# Altium PCB STM32F030F4_Mini.PcbDoc
Units mil, origin at the board's own origin, x right, y up, seen from the top; angles counter-clockwise.
Board outline 1250 x 1630 mil, 2 copper layers (Top Layer, Bottom Layer); 24 components, 26 nets, 99 pads, 11 vias.
Unrouted connection lines stored in the file: 13.
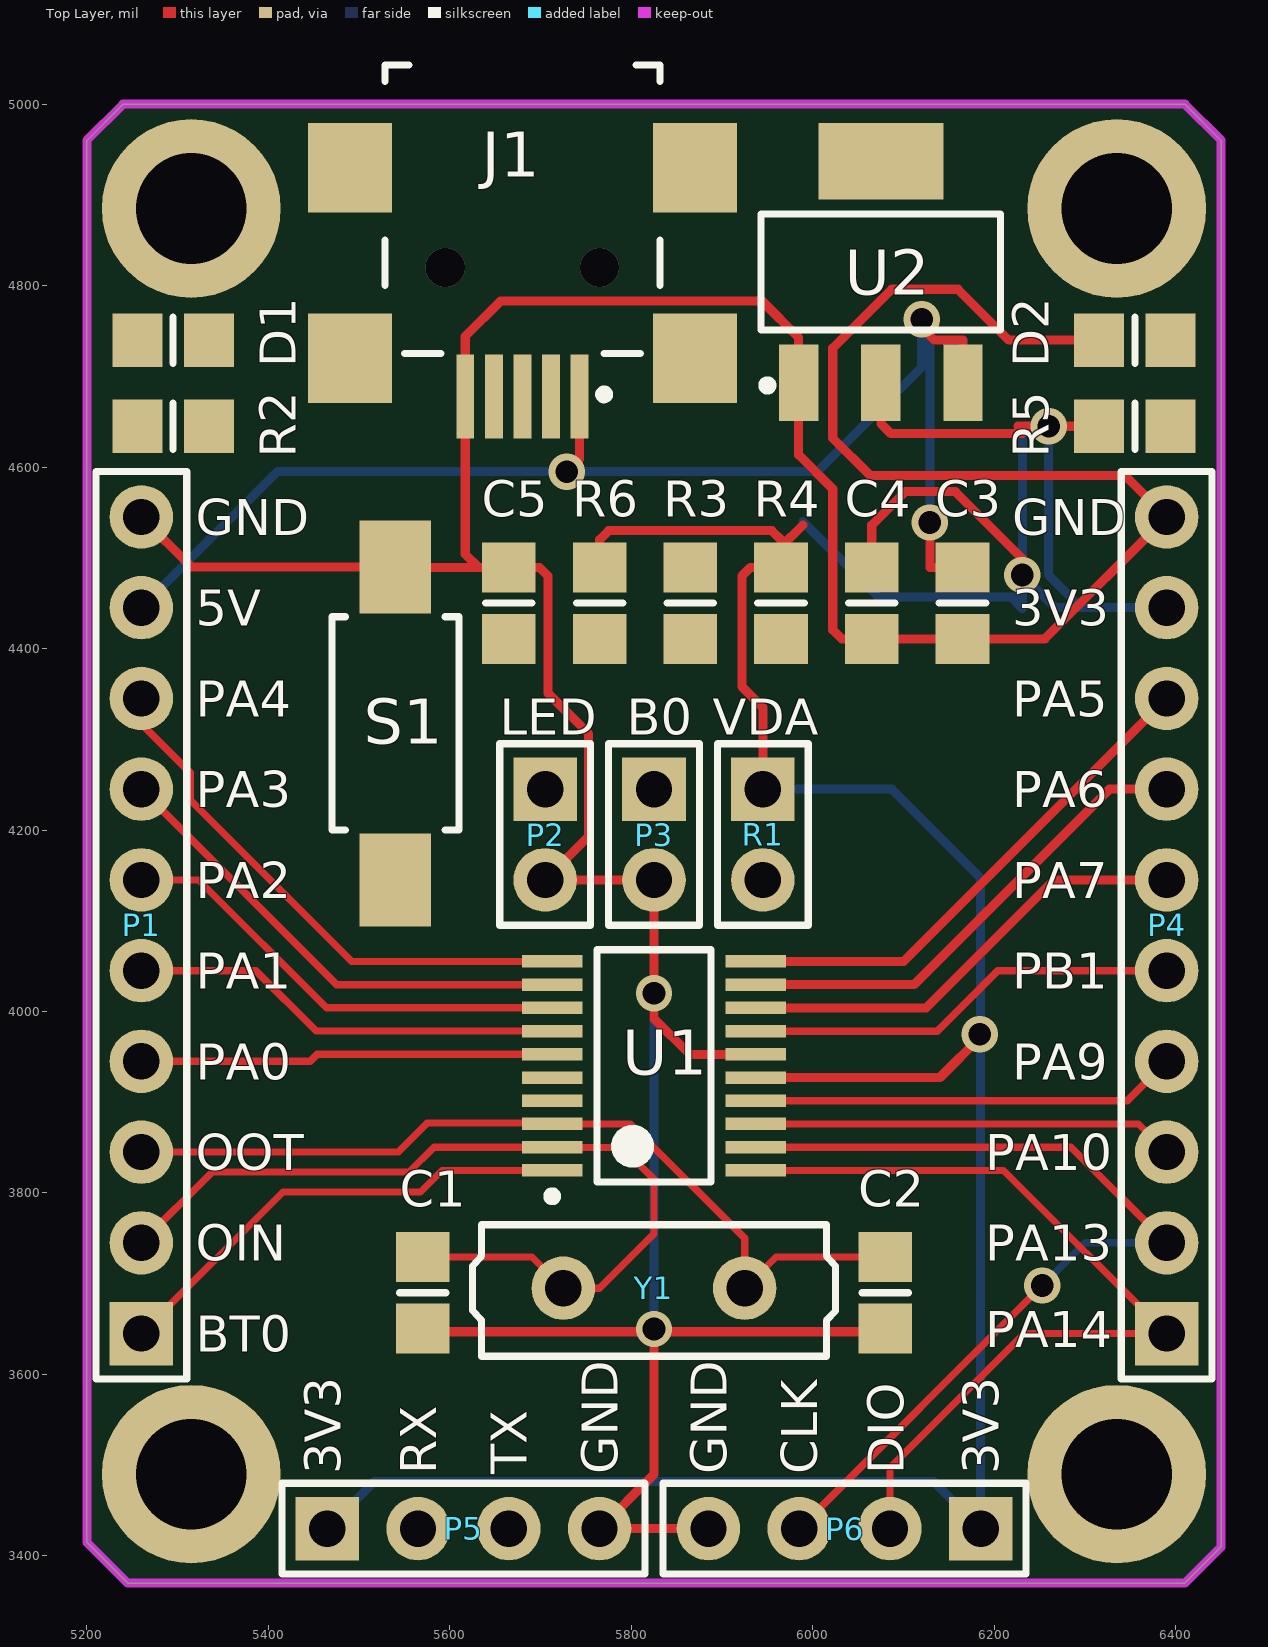
[diagram p0: Top Layer view]
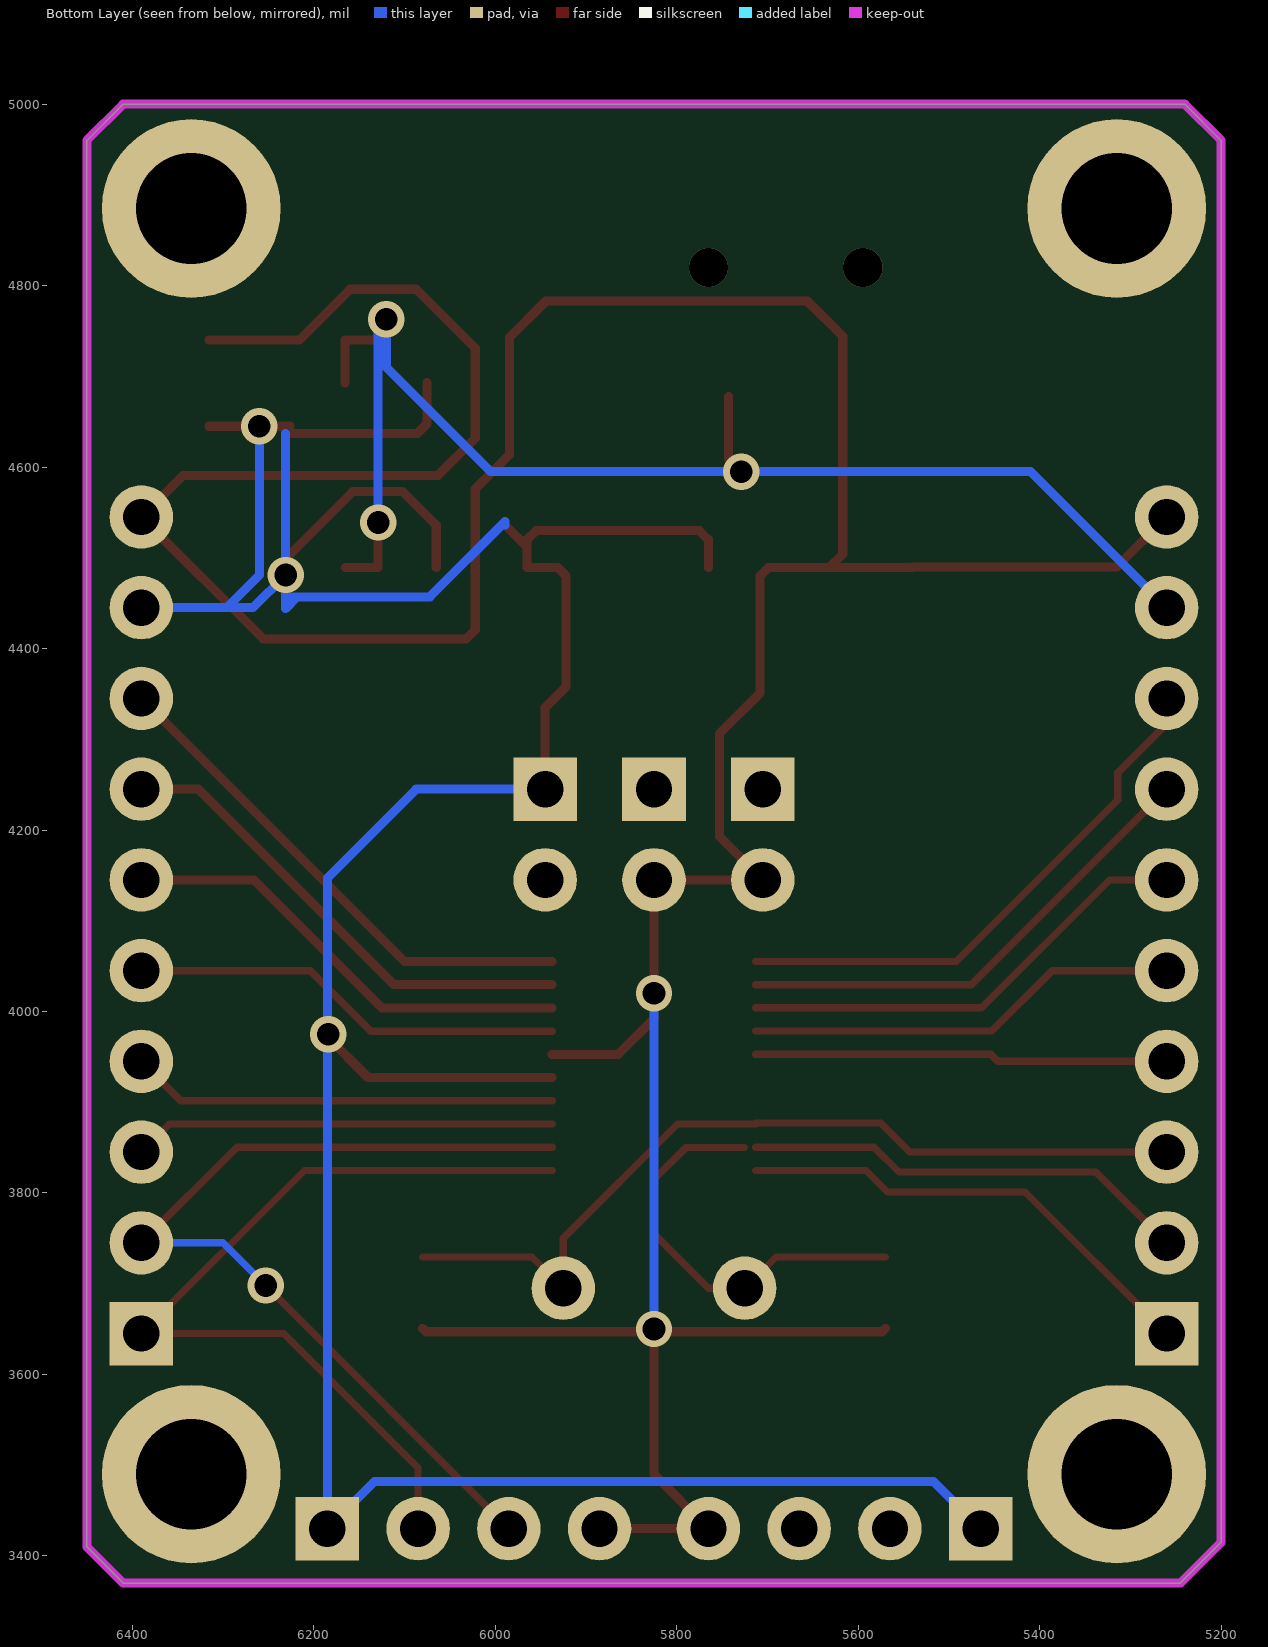
[diagram p1: Bottom Layer view, seen from below]

## Layer stack, top to bottom
Top Layer: signal copper 1.4
Dielectric: dielectric 12.6, FR-4, Dk 4.8
Bottom Layer: signal copper 1.4

## Board outline
5200,3415 5200,4960 5240,5000 6410,5000 6450,4960 6450,3410 6410,3370 5245,3370

## Design rules (kind name [scope] priority, off if disabled: settings)
Clearance [All] p1: gap=8
FabricationTestPointUsage TestPointUsage [All] p1: valid=0 allowmultiple=FALSE
FabricationTestpoint Testpoint [All] p1: side=3 testpointundercomponent=TRUE minsize=40 maxsize=100 preferedsize=60 minholesize=0 maxholesize=40 preferedholesize=32 testpointgrid=1 allowsidetop=TRUE allowsidebottom=TRUE usegrid=TRUE gridtolerance=0.01
HoleSize [All] p1: absolutevalues=TRUE maxlimit=150 minlimit=8 maxpercent=80.000 minpercent=20.000
PolygonConnect [All] p1: connectstyle=Relief reliefconductorwidth=10 reliefentries=4 polygonreliefangle="90 Angle"
RoutingPriority RoutingPriority_5V [InNet('5V')] p1: routingpriority=10
RoutingPriority RoutingPriority_3V3 [InNet('3V3')] p2: routingpriority=20
RoutingPriority RoutingPriority_GND [InNet('GND')] p3: routingpriority=30
RoutingVias RoutingVias_Power [InNetClass('Power')] p1: holewidth=25 width=40 viastyle="Through Hole" minholewidth=25 minwidth=40 maxholewidth=25 maxwidth=40
RoutingVias [All] p2: holewidth=20 width=30 viastyle="Through Hole" minholewidth=20 minwidth=30 maxholewidth=20 maxwidth=30
SMDNeckDown [All] p1: percent=80.000
SilkscreenOverComponentPads [All] p1: minsilkscreentomaskgap=10
SolderMaskExpansion [All] p1: expansion=4
Width Width_GND [InNet('GND')] p1: maxlimit=15 minlimit=8 preferedwidth=10
Width Width_5V [InNet('5V')] p2: maxlimit=15 minlimit=8 preferedwidth=10
Width Width_3V3 [InNet('3V3')] p3: maxlimit=15 minlimit=8 preferedwidth=10
Width [All] p4: maxlimit=15 minlimit=8 preferedwidth=8
23 further rules are at their usual default settings.

## Classes and differential pairs
net class Power: 3V3 5V GND

## Components (designator, comment, footprint, x,y, rotation, side; value= is the part's Value field where it differs from the comment)
C1 "Cap" 6-0805_M 5570,3690 r90 top
C2 "Cap" 6-0805_M 6080,3690 r90 top
C3 "Cap" 6-0805_M 6165,4450 r90 top
C4 "Cap" 6-0805_M 6065,4450 r90 top
C5 "Cap" 6-0805_M 5665,4450 r90 top
D1 "LED" 6-0805_M 5295,4740 r0 top
D2 "PWB" 6-0805_M 6355,4740 r180 top
J1 "USB-MINI" USB-SM 5680,4775 r90 top
P1 "Header 10" HDR1X10 5260,3645 r90 top
P2 "LED" HDR1X2 5705,4245 r270 top
P3 "B0" HDR1X2 5825,4245 r270 top
P4 "Header 10" HDR1X10 6390,3645 r90 top
P5 "Header 4" HDR1X4 5465,3430 r0 top
P6 "Header 4" HDR1X4 6185,3430 r180 top
R1 "VDA" HDR1X2 5945,4245 r270 top
R2 "Res2" 6-0805_M 5295,4645 r0 top
R3 "Res2" 6-0805_M 5865,4450 r270 top
R4 "Res2" 6-0805_M 5965,4450 r270 top
R5 "Res2" 6-0805_M 6355,4645 r0 top
R6 "Res2" 6-0805_M 5765,4450 r270 top
S1 "SW-PB" "SPST-2(6*3.5) - SM" 5540,4320 r270 top
U1 "STM32F030F4P6" TSSOP20 5825,3940 r0 top
U2 "AMS1117" SOT-223 6075,4815 r0 top
Y1 "XTAL" XTAL1 5825,3695 r0 top

## Footprints (in the part's own frame and the unit in brackets; to place one, negate y for a bottom-side part, rotate by r counter-clockwise, add the part's x,y. Pads: shape width x height; smd on the part's side, far side on the other; paste and mask are expansions set on the pad)
6-0805_M [mm] "Chip Resistor, Body 2.0x1.2mm, IPC Low Density"
  rect 1.4x1.5 smd: 1(-1,0) 2(1,0)
  silkscreen extent 0,-0.65 0,0.65, body extent -1.07,-0.7 1.07,0.7, height 0.7
HDR1X2 [mil] "Connector; Header; 2 Position"
  rect 70x70 hole 40: 1(0,0)
  round 70 hole 40: 2(100,0)
  silkscreen extent -50,-50 150,50
HDR1X4 [mil] "Connector; Header; 4 Position"
  rect 70x70 hole 40: 1(0,0)
  round 70 hole 40: 2(100,0) 3(200,0) 4(300,0)
  silkscreen extent -50,-50 350,50
HDR1X10 [mil] "Connector; Header; 10 Position"
  rect 70x70 hole 40: 1(0,0)
  round 70 hole 40: 2(100,0) 3(200,0) 4(300,0) 5(400,0) 6(500,0) 7(600,0) 8(700,0) 9(800,0) 10(900,0)
  silkscreen extent -50,-50 950,50
SOT-223 [mm] "SOT-223/SC-73; 4 Leads; Body 6.7 x 7."
  rect 1.1x2.15 smd: 1(-2.3,-3.1) 2(0,-3.1) 3(2.3,-3.1)
  rect 3.5x2.15 smd: 4(0,3.1)
  silkscreen extent -3.35,-3.3 3.35,1.62
"SPST-2(6*3.5) - SM" [mm] "Circuit Breaker; 2 Leads"
  rect 2.6x2 smd: 1(-4.318,0) 2(4.445,0)
  silkscreen extent -2.92,-1.78 3.05,1.78
TSSOP20 [mm]
  rect 1.7x0.35 smd: 1(-2.85,-2.925) 2(-2.85,-2.275) 3(-2.85,-1.625) 4(-2.85,-0.975) 5(-2.85,-0.325) 6(-2.85,0.325) 7(-2.85,0.975) 8(-2.85,1.625) 9(-2.85,2.275) 10(-2.85,2.925) 11(2.85,2.925) 12(2.85,2.275) 13(2.85,1.625) 14(2.85,0.975) 15(2.85,0.325) 16(2.85,-0.325) 17(2.85,-0.975) 18(2.85,-1.625) 19(2.85,-2.275) 20(2.85,-2.925)
  silkscreen extent -2.97,-3.77 1.6,3.25
USB-SM [mm] "Connector; USB Mini-B, Sinking Type, SM; 5 Position; Right Angle"
  rect 2.35x0.5 smd: 1(-2.465,-1.6) 2(-2.465,-0.8) 3(-2.465,0) 4(-2.465,1.6) 5(-2.465,0.8)
  rect 2.5x2.35 smd: 6(-1.397,-4.826) 7(3.937,-4.826) 8(3.937,4.826) 9(-1.397,4.826)
  silkscreen extent -2.54,-3.85 6.81,3.85
XTAL1 [mil]
  round 70 hole 40: 1(-100,0) 2(100,0)
  silkscreen extent -200,-75 200,70

## Part data
C1 C2 C3 C4 C5: "Capacitor"
D1 D2: library part LED-2P, "发光二极管"
P1 P4: "Header, 10-Pin"
P2 P3: library part "Header 2", "Header, 2-Pin"
P5 P6: "Header, 4-Pin"
R1: library part Res2, "Resistor"
R2 R3 R4 R5 R6: "Resistor"
S1: "Switch"
U1: "STM32F0"
U2: "低压稳压器-1A"
Y1: "Crystal Oscillator"

## Free pads (board coordinates)
  round 196.85 hole 122.05: 0(5315,3490) 1(6335,3490) 2(6335,4885) 3(5315,4885)

## Via types
v1: diameter 40, hole 25, Top Layer to Bottom Layer, 9 vias
v2: diameter 43.31, hole 43.31, Top Layer to Bottom Layer, 2 vias

## Nets (pads, with @x,y where several pads share a name; then routed paths per layer and width w, separated by ;. In a path a pad name is that pad's centre, name@x,y a point inside that pad or via, vN(x,y) a via of type N, cw(c..) or ccw(c..) an arc to the next point about the centre after c; other vN are vias at no path point)
3V3: C4.2 P4.9 P5.1 P6.1 R1.1 R4.1 R5.1 R6.1 U1.16 U2.2 | length 4085
  Top Layer w10: R6.1 5765,4520 5775,4530 5955,4530 5965,4520 R4.1@5965,4512 ; U1.16 6140.2,3927.2 v1@6186,3973 ; R1.1 5945,4335 5922,4358 5922,4480 5931.37,4489.37 R4.1 R4.1@5965,4512 ; 5989,4536 R4.1@5965,4512 ; C4.2 6065,4536 6101.93,4572.93 6157,4572.93 6231,4498.93 v1(6231,4481) ; U2.2 6075,4648 6086,4637 6231,4637 6226,4645 v1(6260,4645) R5.1
  Bottom Layer w10: P5.1 5517,3482 6133,3482 P6.1 6185,4147 6087,4245 R1.1 ; 5989,4536 5989,4540 6072,4457 6218,4457 ; 6231,4637 v1(6231,4481) ; v1(6260,4645) 6260,4481 6296,4445 ; P4.9 6296,4445 ; 6218,4457 6231,4457 ; 6218,4457 6231,4444 6231,4457 ; 6231,4457 v1(6231,4481) ; v1(6231,4481) 6267,4445 6296,4445
  other v1: 6184,3975
5V: C3.2 J1.1 P1.9 U2.3 | length 1532.3
  Top Layer w10: v1(5728.99,4595) 5742.99,4609 J1.1 ; v1(6120,4763) 6120,4754 6134,4740 6165.55,4740 U2.3 ; v1(6129,4539) 6129,4489.37 C3.2
  Bottom Layer w10: P1.9 5410,4595 v1(5728.99,4595) 6005,4595 6120,4710 v1(6120,4763) 6129,4754 v1(6129,4539)
BOOT0: P1.1 R3.1 U1.1 | length 527.3
  Top Layer w8: P1.1 5416,3801 5567.57,3801 5591.41,3824.84 U1.1
GND: C1.1 C2.1 C3.1 C4.1 C5.2 D2.2 J1.4 P1.10 P2.2 P3.2 P4.10 P5.4 P6.4 S1.1 U1.15 U2.1 | length 4771.2
  Top Layer w10: P1.10 5315,4490 S1.1 5540,4489.37 5631.64,4489.37 ; C1.1 5573.63,3647 6076.37,3647 C2.1 ; v1(5825,3650) 5825,3490 P5.4 P6.4 ; U1.15 5864.2,3952.8 5825,3992 v1(5825,4020) P3.2 P2.2 5753,4193 5753,4306 5708,4351 5708,4480 5698.63,4489.37 C5.2 5631.64,4489.37 ; D2.2 6216,4740 6160,4796 6087,4796 6022,4731 6022,4632 6063.07,4590.93 6344.07,4590.93 P4.10 6255.63,4410.63 C3.1 C4.1 6032,4410.63 6022,4420.63 6022,4575.83 5984.45,4613.38 U2.1 5984.45,4742.55 5944,4783 5656,4783 5617.01,4744.01 J1.4 5617.01,4504 5631.64,4489.37
  Bottom Layer w10: v1(5825,3650) v1(5825,4020)
NetC5_1: C5.1 R6.2
NetD1_1: D1.1 R2.1
NetD1_2: D1.2 P2.1
NetD2_1: D2.1 R5.2
NetP3_1: P3.1 R3.2 R4.2
NRST: S1.2 U1.4
PA0: P1.4 U1.6 | length 456
  Top Layer w8: P1.4 5446,3945 5453.8,3952.8 U1.6
PA1: P1.5 U1.7 | length 480.4
  Top Layer w8: P1.5 5386,4045 5452.61,3978.39 U1.7
PA2: P1.6 U1.8 | length 511.2
  Top Layer w8: P1.6 5323,4145 5464.02,4003.98 U1.8
PA3: P1.7 U1.9 | length 542
  Top Layer w8: P1.7 5475.43,4029.57 U1.9
PA4: P1.8 R2.2 U1.10 | length 606.8
  Top Layer w8: P1.8 5260,4317 5314,4263 5314,4233 5491.84,4055.16 U1.10
PA5: P4.8 U1.11 | length 572.9
  Top Layer w10: U1.11 6100.16,4055.16 P4.8
PA6: P4.7 U1.12 | length 542
  Top Layer w10: U1.12 6111.57,4029.57 6327,4245 P4.7
PA7: P4.6 U1.13 | length 511.2
  Top Layer w10: U1.13 6124.98,4003.98 6266,4145 P4.6
PA9: P4.4 P5.3 U1.17 | length 470.8
  Top Layer w8: U1.17 6346.61,3901.61 P4.4
PA10: P4.3 P5.2 U1.18 | length 465.6
  Top Layer w8: U1.18 6358.98,3876.02 P4.3
PA13: P4.2 P6.3 U1.19 | length 1031.9
  Top Layer w8: U1.19 6284.57,3850.43 P4.2 ; P6.3 v1(6253,3698)
  Bottom Layer w8: v1(6253,3698) 6300,3745 P4.2
PA14: P4.1 P6.2 U1.20 | length 960.6
  Top Layer w8: U1.20 6210.16,3824.84 P4.1 6233,3645 6085,3497 P6.2
PB1: P4.5 U1.14 | length 480.4
  Top Layer w8.27: U1.14 6137.39,3978.39 6204,4045 P4.5
PF0: C1.2 P1.2 U1.2 Y1.1 | length 970.4
  Top Layer w8: P1.2 5338,3823 5555,3823 5582.43,3850.43 U1.2 ; C1.2 5690.63,3729.37 5715,3705 5725,3705 Y1.1 5765,3695 5825,3755 5825,3815 ; U1.2@5725.5,3850 5790,3850
  Top Layer w8.27: 5790,3850 5825,3815
PF1: C2.2 P1.3 U1.3 Y1.2 | length 954.7
  Top Layer w8: P1.3 5543,3845 5575,3877 U1.3@5712.8,3877 ; U1.3 5798.98,3876.02 5925,3750 Y1.2 5959.37,3729.37 C2.2
VDDA: R1.2 U1.5
pads on no net: J1.2 J1.3 J1.5 J1.6 J1.7 J1.8 J1.9 U2.4
copper on no net:
  other v2: 5595,4820 5765,4820

## Keep-outs
Keep-Out Layer:
  the board outline again, w10

## Silkscreen, mask and mechanical layers (free items; w line width, h text height)
Top Overlay:
  text "GND" at 5320,4525 h40
  text "GND" at 6220,4525 h40
  text "5V" at 5320,4425 h40
  text "3V3" at 6220,4425 h40
  text "PA4" at 5320,4325 h40
  text "PA5" at 6220,4325 h40
  text "PA3" at 5320,4225 h40
  text "PA6" at 6220,4225 h40
  text "PA2" at 5320,4125 h40
  text "PA7" at 6220,4125 h40
  text "PA1" at 5320,4025 h40
  text "PB1" at 6220,4025 h40
  text "PA0" at 5320,3925 h40
  text "PA9" at 6220,3925 h40
  text "OOT" at 5320,3825 h40
  text "PA10" at 6190,3825 h40
  text "OIN" at 5320,3725 h40
  text "PA13" at 6190,3725 h40
  text "PA14" at 6190,3630 h40
  text "BT0" at 5320,3625 h40
  text "3V3" at 5480,3490 h40 r90
  text "RX" at 5585,3490 h40 r90
  text "TX" at 5685,3490 h40 r90
  text "GND" at 5785,3490 h40 r90
  text "GND" at 5905,3490 h40 r90
  text "CLK" at 6005,3490 h40 r90
  text "DIO" at 6100,3490 h40 r90
  text "3V3" at 6205,3490 h40 r90
Mechanical 16:
  drawing of 1874 lines, arcs and shapes, not listed
  text "1" at 1427,7465 h60
  text "2" at 4287,7465 h60
  text "3" at 7167,7465 h60
  text "4" at 10037,7465 h60
  text "A" at 75,6559 h60
  text "A" at 11375,6559 h60
  text "B" at 75,4667 h60
  text "B" at 11375,4667 h60
  text "C" at 75,2757 h60
  text "ENGINEER:" at 6850,1300 h60
  text "TITLE:" at 8350,1300 h60
  text "PCB DESIGNER:" at 6850,1005 h60
  text "D" at 75,867 h60
  text "D" at 11375,867 h60
  text "DATE:" at 6850,700 h60
  text "PART NO.:" at 8350,700 h60
  text "REV:" at 10450,700 h60
  text "Altium Limited" at 5550,600 h60
  text ".PRINT_DATE" at 6900,580 h60
  text "12a Rodborough Rd" at 5550,500 h60
  text "Frenchs Forest" at 5550,400 h60
  text "FILE NAME:" at 6850,400 h60
  text "DWG NO:" at 8350,400 h60
  text "SCALE:" at 10450,400 h60
  text "NSW 2086" at 5550,300 h60
  text ".PCB_FILE_NAME_NO_PATH" at 6900,280 h60
  text "2" at 4287,65 h60
  text "3" at 7167,65 h60
  text "4" at 10037,65 h60